# Altium PCB Connector_PCBv2.PcbDoc
Units mm, origin at the board's own origin, x right, y up, seen from the top; angles counter-clockwise.
Board outline 37.21 x 50.42 mm, 2 copper layers (Top Layer, Bottom Layer); 17 components, 16 nets, 80 pads, 0 vias.
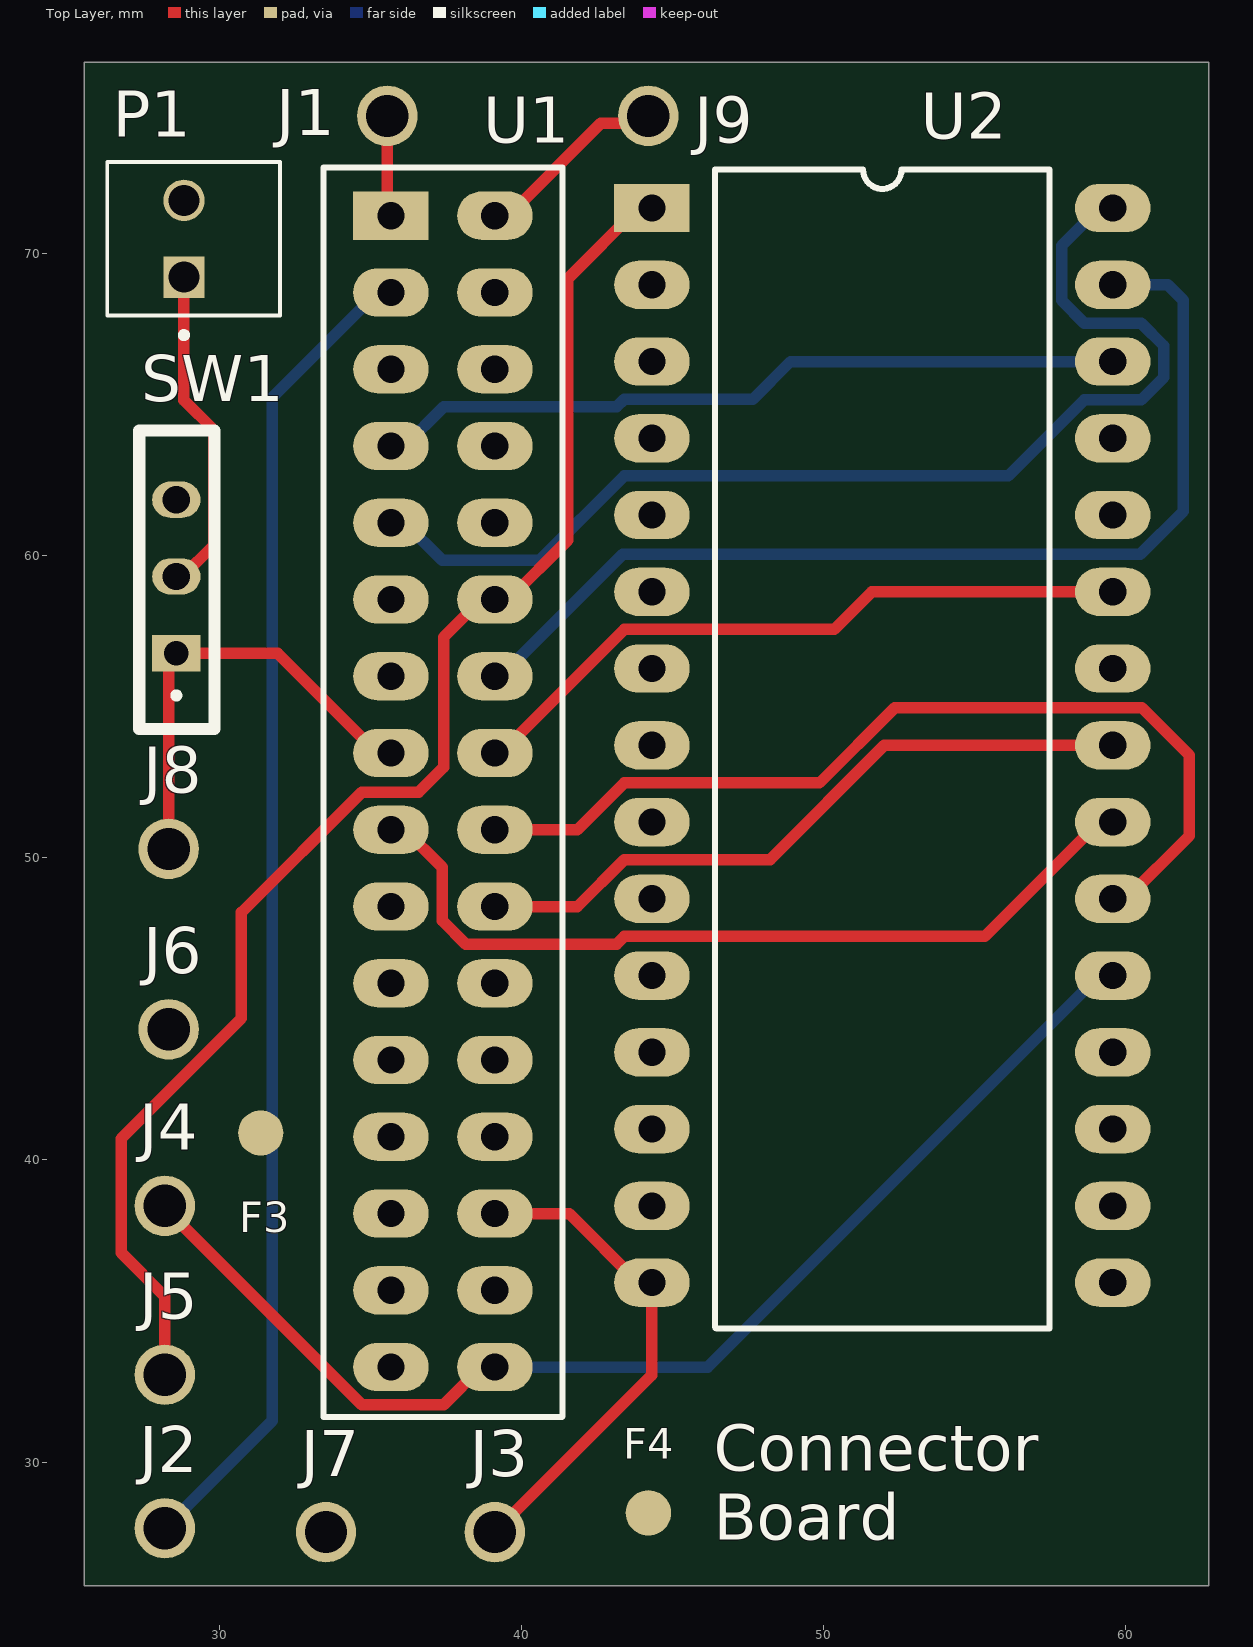
[diagram p0: Top Layer view]
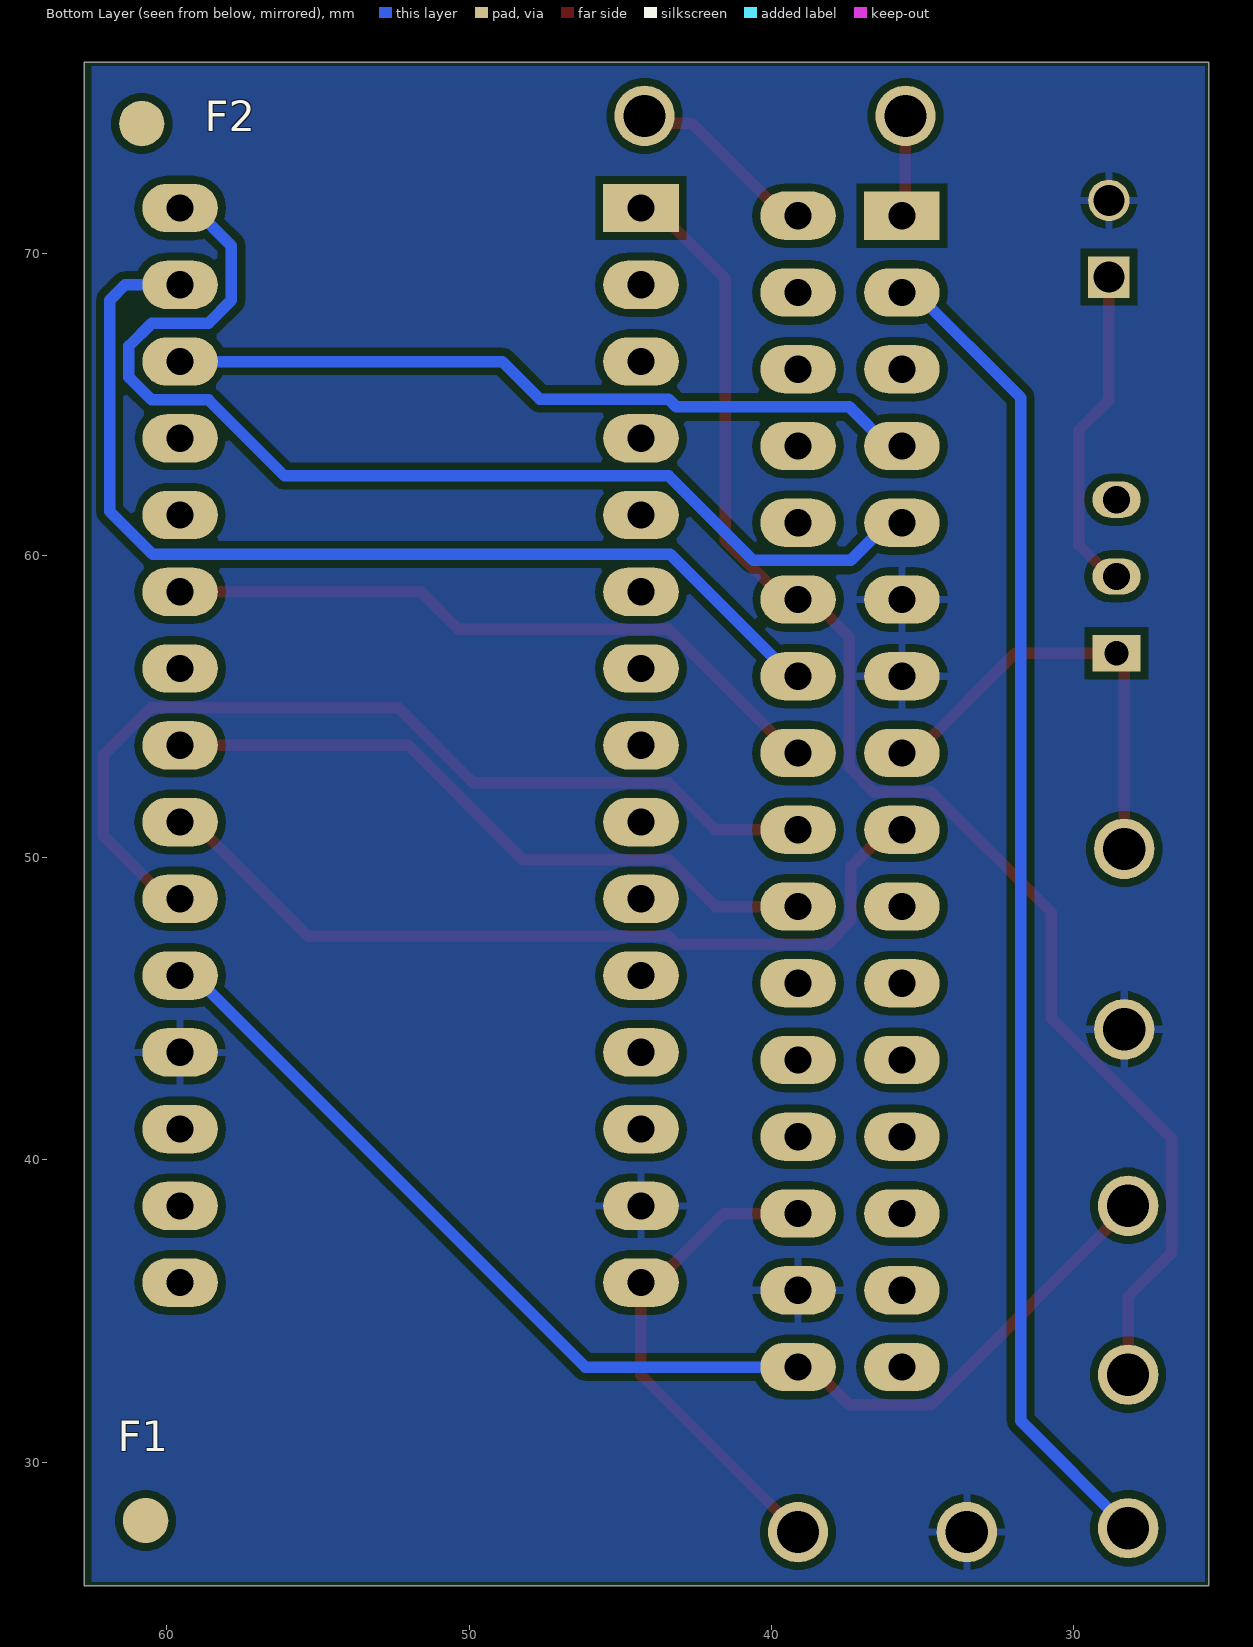
[diagram p1: Bottom Layer view, seen from below]

## Layer stack, top to bottom
Top Solder: solder mask 0.0102, Solder Resist, Dk 3.5
Top Layer: signal copper 0.0356
Dielectric 1: dielectric 0.32, FR-4, Dk 4.8
Bottom Layer: signal copper 0.0356
Bottom Solder: solder mask 0.0102, Solder Resist, Dk 3.5

## Board outline
25.527,76.327 25.527,25.908 62.738,25.908 62.738,76.327

## Design rules (kind name [scope] priority, off if disabled: settings)
Clearance [All] p1: gap=0.254 ignorepadtopadclearanceinfootprint=FALSE except(0: Arc-Hole Track-Hole SMDPad-Hole THPad-Hole Via-Hole Fill-Hole Poly-Hole Region-Hole Text-Hole)
PolygonConnect [All] p1: connectstyle=Relief reliefconductorwidth=0.254 reliefentries=4 polygonreliefangle="90 Angle" airgapwidth=0.254
RoutingVias [All] p1: holewidth=0.711 width=1.27 viastyle="Through Hole" minholewidth=0.711 minwidth=1.27 maxholewidth=0.711 maxwidth=1.27
SolderMaskExpansion [All] p1: expansion=0.102 istentingtop=FALSE
Width [All] p1: maxlimit=0.5 minlimit=0.254 preferedwidth=0.254
30 further rules are at their usual default settings.

## Components (designator, comment, footprint, x,y, rotation, side; value= is the part's Value field where it differs from the comment)
F1 "FID" Fiducial_1.5mm 60.706,28.067 r180 bottom
F2 "FID" Fiducial_1.5mm 60.833,74.295 r180 bottom
F3 "FID" Fiducial_1.5mm 31.369,40.894 r0 top
F4 "FID" Fiducial_1.5mm 44.196,28.321 r0 top
J1 "ANODE" "TEST POINTS" 35.56,74.549 r0 top
J2 "GND" "TEST POINTS" 28.194,27.813 r0 top
J3 "3V3OUT" "TEST POINTS" 39.116,27.686 r0 top
J4 "SAFETY" "TEST POINTS" 28.194,38.481 r0 top
J5 "SCK" "TEST POINTS" 28.194,32.893 r0 top
J6 "GND" "TEST POINTS" 28.321,44.323 r0 top
J7 "GND" "TEST POINTS" 33.528,27.686 r0 top
J8 "VBAT" "TEST POINTS" 28.321,50.292 r0 top
J9 "CATH1" "TEST POINTS" 44.196,74.549 r0 top
P1 "KK Series Connector" "KK series connector header" 28.829,69.215 r270 top
SW1 "2.54mm slide switch" "2.54mm Mini Slide Switch" 28.575,59.309 r180 top
U1 "MOTIMOVE Module" "MOTIMOVE Module" 46.116,55.321 r0 top
U2 "Arduino Nano 33 BLE" "Arduino Nano 33 BLE" 52.339,63.576 r0 top

## Footprints (in the part's own frame and the unit in brackets; to place one, negate y for a bottom-side part, rotate by r counter-clockwise, add the part's x,y. Pads: shape width x height; smd on the part's side, far side on the other; paste and mask are expansions set on the pad)
"2.54mm Mini Slide Switch" [mm]
  oval 1.6x1.2 hole 0.9: COM(0,0) OFF(0,-2.54)
  rect 1.6x1.2 hole 0.8: ON(0,2.54)
  silkscreen extent -1.27,-4.83 1.23,5.05
"Arduino Nano 33 BLE" [mm]
  rect 2.5x1.6 hole 0.9: 1(-8.026,7.925)
  oval 2.5x1.6 hole 0.9: 2(-8.026,5.385) 3(-8.026,2.845) 4(-8.026,0.305) 5(-8.026,-2.235) 6(-8.026,-4.775) 7(-8.026,-7.315) 8(-8.026,-9.855) 9(-8.026,-12.395) 10(-8.026,-14.935) 11(-8.026,-17.475) 12(-8.026,-20.015) 13(-8.026,-22.555) 14(-8.026,-25.095) 15(-8.026,-27.635) 16(7.224,-27.635) 17(7.224,-25.095) 18(7.224,-22.555) 19(7.224,-20.015) 20(7.224,-17.475) 21(7.224,-14.935) 22(7.224,-12.395) 23(7.224,-9.855) 24(7.224,-7.315) 25(7.224,-4.775) 26(7.224,-2.235) 27(7.224,0.305) 28(7.224,2.845) 29(7.224,5.385) 30(7.224,7.925)
  silkscreen extent -5.94,-29.16 5.14,9.19
Fiducial_1.5mm [mm] "1.5mm Fiducial"
  round 1.5 smd mask+0.75: 1(0,0)
"KK series connector header" [mm]
  rect 1.37x1.37 hole 1.02: 1(0,0)
  round 1.37 hole 1.02: 2(-2.54,0)
  silkscreen extent -3.81,-2.54 2.02,3.18
"MOTIMOVE Module" [mm]
  rect 2.5x1.6 hole 0.9: 1(-10.439,15.926)
  oval 2.5x1.6 hole 0.9: 2(-10.439,13.386) 3(-10.439,10.846) 4(-10.439,8.306) 5(-10.439,5.766) 6(-10.439,3.226) 7(-10.439,0.686) 8(-10.439,-1.854) 9(-10.439,-4.394) 10(-10.439,-6.934) 11(-10.439,-9.474) 12(-10.439,-12.014) 13(-10.439,-14.554) 14(-10.439,-17.094) 15(-10.439,-19.634) 16(-10.439,-22.174) 17(-7,15.926) 18(-7,13.386) 19(-7,10.846) 20(-7,8.306) 21(-7,5.766) 22(-7,3.226) 23(-7,0.686) 24(-7,-1.854) 25(-7,-4.394) 26(-7,-6.934) 27(-7,-9.474) 28(-7,-12.014) 29(-7,-14.554) 30(-7,-17.094) 31(-7,-19.634) 32(-7,-22.174)
  silkscreen extent -12.67,-23.83 -4.77,17.53
"TEST POINTS" [mm]
  round 2 hole 1.4: 1(0,0)

## Part data
F1 F2 F3 F4: library part FIDUCIAL, "1.5mm Fiducial", Case/Package=SMD, Manufacturer=NA, Manufacturer Part Number=NA, Supplier=NA, Supplier Part Number=NA
J1 J2 J3 J4 J5 J6 J7 J8 J9: library part "TEST POINTS", "Test Points 1.02mm"
P1: library part Connector, "CONNECTOR : KK Style - Straight Header / 02 Way / 2.54mm Pitch / With Friction Lock"
SW1: "Mouser - 710450301014042"

## Nets (pads, with @x,y where several pads share a name; then routed paths per layer and width w, separated by ;. In a path a pad name is that pad's centre, name@x,y a point inside that pad or via, vN(x,y) a via of type N, cw(c..) or ccw(c..) an arc to the next point about the centre after c; other vN are vias at no path point)
3V3_IN: J3.1 U1.30 U2.15 | length 16.6
  Top Layer w0.381: J3.1 44.313,32.883 U2.15 43.863,35.941 41.577,38.227 U1.30
5V_EN: U1.9 U2.22 | length 28.2
  Top Layer w0.381: U1.9 36.127,50.927 37.372,49.682 37.372,47.922 38.151,47.142 43.145,47.142 43.399,47.396 55.328,47.396 59.113,51.181 U2.22
Battery: J8.1 SW1.ON U1.8 | length 15.1
  Top Layer w0.381: J8.1 28.321,56.515 SW1.ON 31.925,56.769 35.227,53.467 U1.8
Com: P1.1 SW1.COM | length 10.9
  Top Layer w0.381: SW1.COM 28.775,59.309 29.82,60.354 29.82,64.153 28.829,65.143 P1.1
GND: J6.1 J7.1 P1.2 U1.6 U1.7 U1.31 U2.14 U2.19
NetJ1_1: J1.1 U1.1 | length 3.4
  Top Layer w0.381: J1.1 35.56,71.364 U1.1
NetJ2_1: J2.1 U1.2 | length 44.3
  Bottom Layer w0.381: J2.1 31.749,31.368 31.749,65.229 35.227,68.707 U1.2
NetJ9_1: J9.1 U1.17 | length 6.4
  Top Layer w0.381: U1.17 39.566,71.247 42.624,74.306 43.953,74.306 J9.1
PULSE1: U1.25 U2.21 | length 31.4
  Top Layer w0.381: U1.25 41.849,50.927 43.399,52.476 49.859,52.476 52.348,54.966 60.528,54.966 62.103,53.391 62.103,50.731 60.013,48.641 U2.21
RELE1: U1.26 U2.23 | length 22.7
  Top Layer w0.381: U1.26 41.849,48.387 43.399,49.936 48.222,49.936 52.007,53.721 U2.23
SAFETY: J4.1 U1.32 U2.20 | length 40
  Top Layer w0.381: J4.1 28.194,38.42 34.712,31.902 37.421,31.902 38.666,33.147 U1.32
  Bottom Layer w0.381: U1.32 46.159,33.147 59.113,46.101 U2.20
SENSE1: U1.24 U2.25 | length 22.7
  Top Layer w0.381: U1.24 39.309,53.467 43.399,57.556 50.352,57.556 51.596,58.801 U2.25
SPI_MISO: U1.5 U2.30 | length 37.7
  Bottom Layer w0.381: U1.5 36.127,61.087 37.372,59.842 40.605,59.842 43.399,62.636 56.109,62.636 58.623,65.151 60.503,65.151 61.258,65.906 61.258,66.936 60.503,67.691 58.623,67.691 57.868,68.446 57.868,70.256 59.113,71.501 U2.30
SPI_MOSI: U1.23 U2.29 | length 34.6
  Bottom Layer w0.381: U1.23 39.309,56.007 43.348,60.046 60.477,60.046 61.893,61.461 61.893,68.453 61.385,68.961 U2.29
SPI_SCK: J5.1 U1.22 U2.1 | length 48.4
  Top Layer w0.381: J5.1 28.194,35.483 26.749,36.927 26.749,40.709 30.731,44.69 30.731,48.19 34.712,52.172 36.591,52.172 37.421,53.002 37.421,57.302 38.666,58.547 U1.22 39.566,58.547 41.526,60.507 41.526,69.164 43.863,71.501 U2.1
SPI_SS: U1.4 U2.28 | length 25
  Bottom Layer w0.381: U1.4 36.127,63.627 37.422,64.922 43.145,64.922 43.399,65.176 47.656,65.176 48.9,66.421 U2.28
pads on no net: F1.1 F2.1 F3.1 F4.1 SW1.OFF U1.3 U1.10 U1.11 U1.12 U1.13 U1.14 U1.15 U1.16 U1.18 U1.19 U1.20 U1.21 U1.27 U1.28 U1.29 U2.2 U2.3 U2.4 U2.5 U2.6 U2.7 U2.8 U2.9 U2.10 U2.11 U2.12 U2.13 U2.16 U2.17 U2.18 U2.24 U2.26 U2.27

## Polygon pours and split planes (outlines as drawn)
GND on Bottom Layer "GND_L02_P000" (solid, pour order 0): 25.654,76.2 25.654,26.035 62.484,26.035 62.484,76.2

## Silkscreen, mask and mechanical layers (free items; w line width, h text height)
Top Overlay:
  text "Connector  / Board" at 46.355,27.432 h1.52